# Altium PCB LimeSDR-Mini_2v5_Rounded.PcbDoc (part 6 of 7)
Units mm, origin at the board's own origin, x right, y up, seen from the top; angles counter-clockwise.
Board outline 69 x 31.37 mm, 8 copper layers (Top, L2, L3, L4, L5, L6, L7, Bottom), stack 1.555 mm thick; 439 components, 294 nets, 1986 pads, 831 vias.
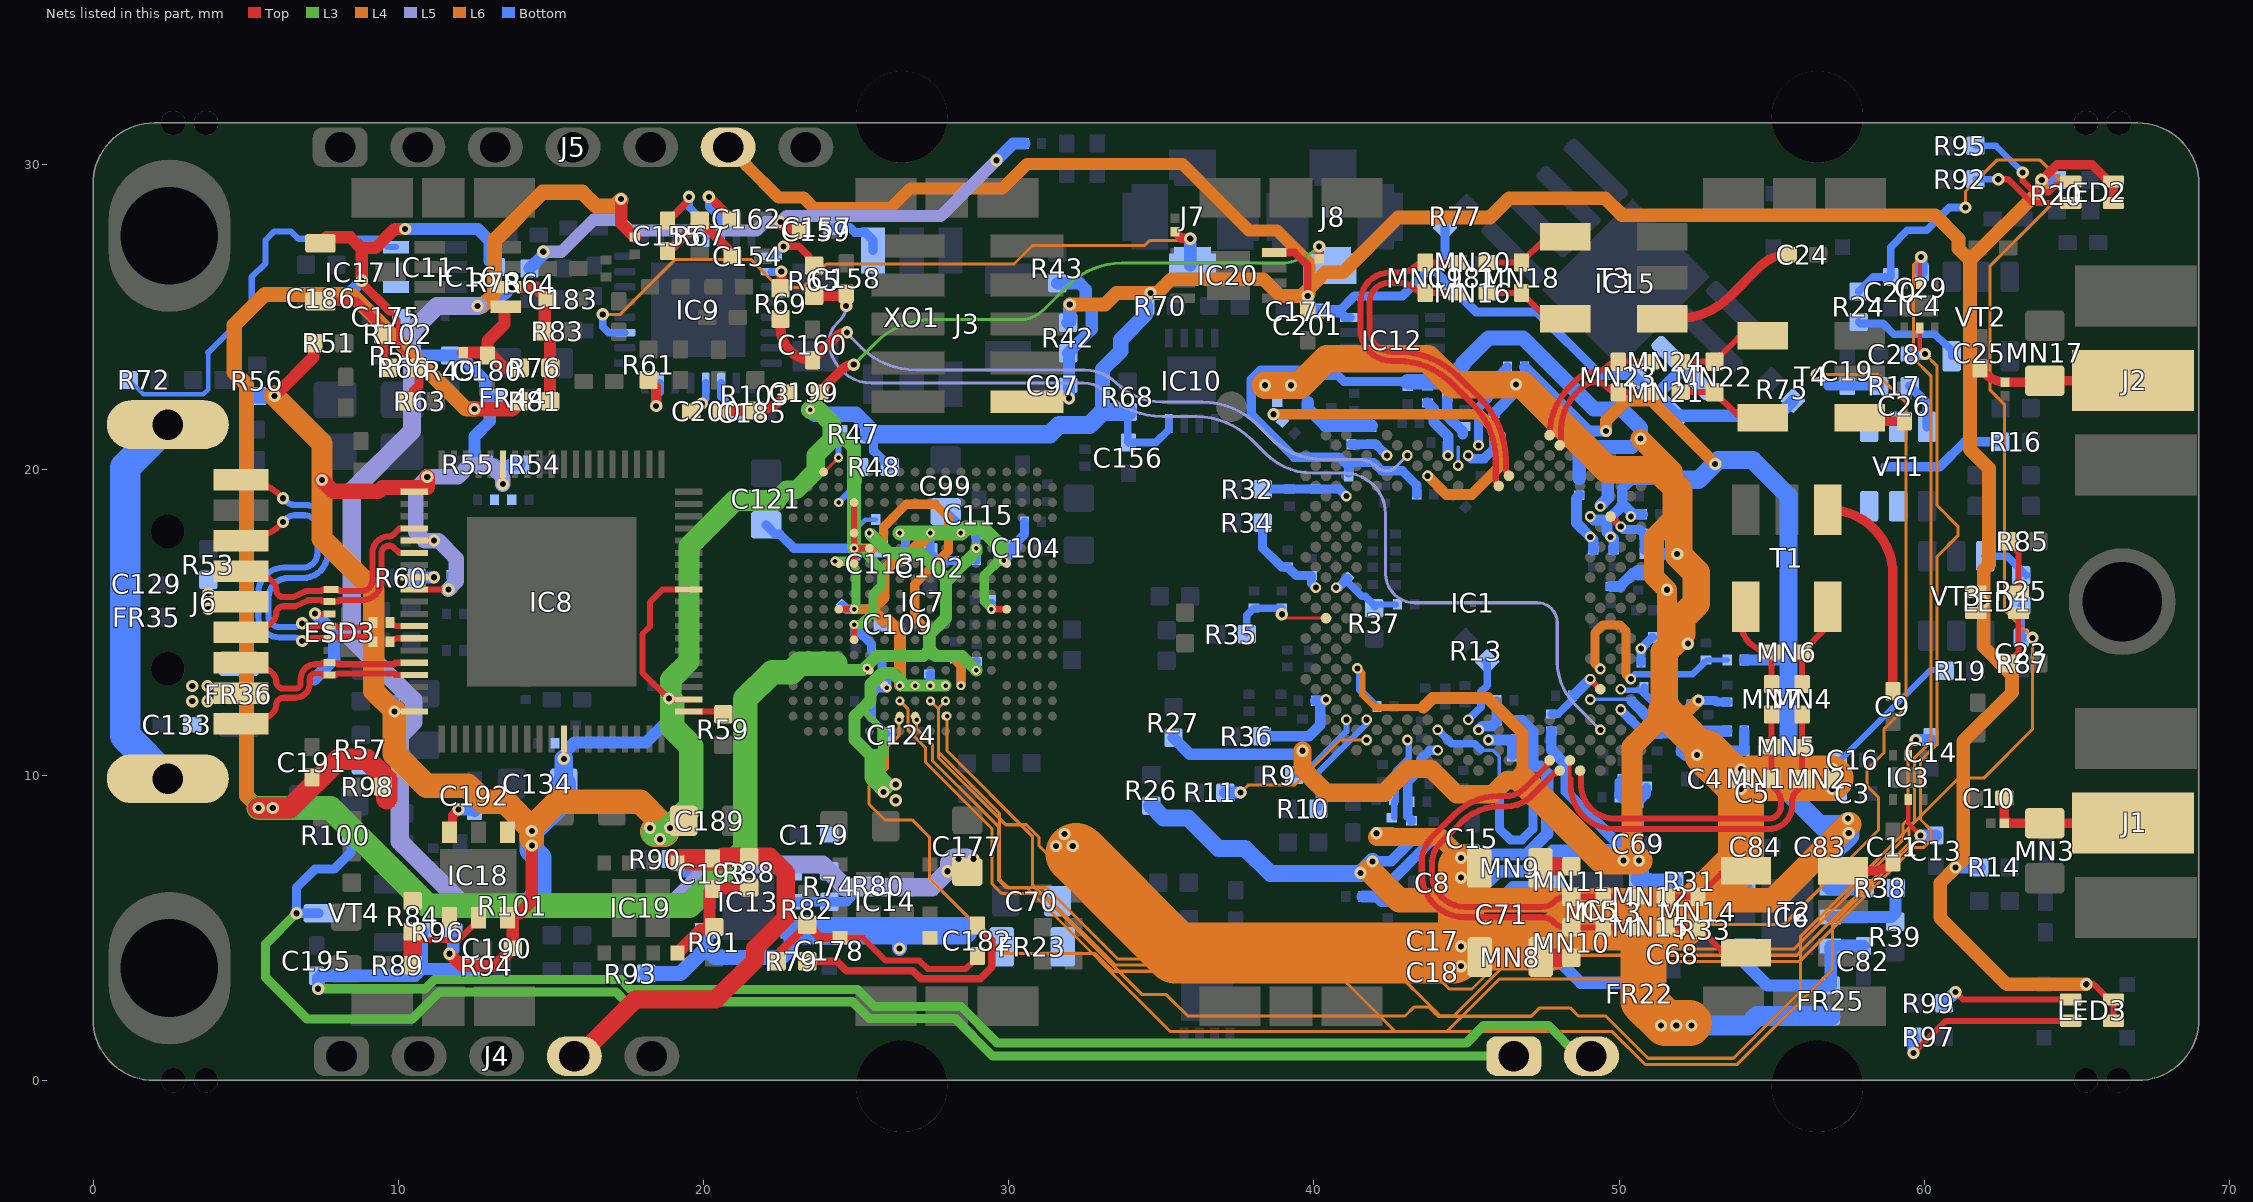
[diagram p11: the nets of this part, all layers, seen from the top]

## Via types
v1: diameter 0.4, hole 0.2, Top to Bottom, tented both sides, 554 vias
v2: diameter 0.3, hole 0.15, Top to Bottom, tented both sides, 160 vias
v3: diameter 0.35, hole 0.2, Top to Bottom, tented both sides, 88 vias
v4: diameter 0.5, hole 0.2, Top to Bottom, tented bottom, 25 vias
v5: diameter 0.5, hole 0.2, Top to Bottom, tented both sides, 4 vias

## Nets (pads, with @x,y where several pads share a name; then routed paths per layer and width w, separated by ;. In a path a pad name is that pad's centre, name@x,y a point inside that pad or via, vN(x,y) a via of type N, cw(c..) or ccw(c..) an arc to the next point about the centre after c; other vN are vias at no path point) (continued)
NetC53_1: C53.1 FR10.1 IC1.AM20 | length 2
  Bottom w0.35: FR10.1@43.725,22.195 43.925,21.995 43.925,21.575 44.4,21.1 C53.1@44.4,20.903 ; v3(44.394,20.474) 44.394,20.901 C53.1@44.396,20.903
NetC54_1: C54.1 FR9.1 IC1.AL19 | length 2
  Bottom w0.11: v3(44.727,20.141) 44.726,20.746
  Bottom w0.35: FR9.1@44.375,22.32 44.375,21.766 44.876,21.265 44.876,21.17
NetC55_1: C55.1 FR8.1 IC1.AG5 | length 0.8
  Bottom w0.4: v3@49.389,18.834 49.633,19.078 49.633,19.58
  other v3: 49.389,18.809
NetC56_2: C56.2 FR7.1 IC1.AD6 | length 2.1
  Bottom w0.35: FR7.1@48.7,19.17 48.606,19.076 48.606,18.26 v3(49.056,17.81) 49.15,17.716 C56.2@49.15,17.38
NetC57_1: C57.1 FR5.1 IC1.J3 | length 2.1
  Bottom w0.18: v3(50.055,12.815) 50.092,12.778 50.723,12.778 C57.1@50.823,12.878
  Bottom w0.25: C57.1@50.823,12.878 50.823,12.677 51.2,12.3 FR5.1@51.745,12.3
NetC58_2: C58.2 FR4.1 IC1.J5 IC1.K6 | length 2.3
  Top w0.2: v3(49.056,13.148) IC1.J5@49.389,12.815
  Bottom w0.25: FR4.1@47.775,12.005 48.005,12.005 48.475,12.475 C58.2@48.475,12.6
  Bottom w0.35: C58.2@48.475,12.6 48.508,12.6 v3(49.056,13.148)
NetC59_2: C59.2 FR12.1 R28.2 R29.2 | length 1.9
  Bottom w0.3: R28.2@50.125,9.895 50.005,9.775 50.005,9.325 50.125,9.205 50.625,9.205 50.73,9.205 50.9,9.375 R29.2@50.9,9.595
NetC60_1: C60.1 FR18.1 IC1.K2 IC1.L5 | length 7.5
  L6 w0.3: v3(49.389,13.481) 49.208,13.662 49.208,14.658 49.475,14.925 50.025,14.925 50.225,14.725 50.225,13.311 v3(50.388,13.148)
  Bottom w0.17: C60.1@52.795,13.695 52.875,13.775 FR18.1@53.545,13.775
  Bottom w0.2: v3(50.388,13.148) v3@50.393,13.153
  Bottom w0.22: v3@50.393,13.178 50.52,13.305 52.405,13.305 C60.1@52.795,13.695
NetC61_1: C61.1 C62.1 FR21.1 IC1.C21 | length 2.9
  Bottom w0.3: FR21.1@43.2,8.505 43.2,8.525 43.075,8.65 43.075,9.775 43.495,10.195 43.495,10.52 43.792,10.817 v3(44.061,10.817)
NetC63_1: C63.1 C64.1 C65.1 FR20.1 IC1.AD4 IC1.AF2 IC1.AF6 | length 4.8
  Bottom w0.35: v3(49.056,18.476) 49.173,18.359 49.635,18.359 ; C65.1@49.825,17.38 49.825,17.737 49.605,17.957 49.605,18.329 49.635,18.359 ; C64.1@50.77,18.55 50.462,18.55 50.18,18.832 50.108,18.832 ; FR20.1@51.045,19.675 50.4,19.675 50.108,19.383 C63.1@50.108,19.142 50.108,18.832 ; 49.635,18.359 50.108,18.832
  other v3: 49.722,17.81 50.388,18.476
NetC66_1: C66.1 FR19.1 IC1.AN17 | length 3
  Bottom w0.3: v3(45.393,20.807) 45.393,22.043 46.075,22.725 46.075,23.105 FR19.1@46.345,23.375
NetC67_1: C67.1 IC1.D24 R30.1 | length 2.7
  Bottom w0.22: R30.1@42.631,8.631 C67.1@42.631,9.146 ; C67.1@42.681,9.146 42.681,10.126 43.114,10.559 43.114,11.098 v3(43.062,11.15)
NetC68_2: C68.2 FR22.2 IC5.1 IC5.6 | length 6
  Bottom w0.4: IC5.1@47.875,4.625 47.875,4.067 48.742,3.2 FR22.2@50.556,3.2 ; FR22.2@50.686,3.33 50.686,4.614 IC5.6@50.675,4.625 51.756,4.625 C68.2@51.761,4.63
NetC71_2: C71.2 IC5.3 | length 1.7
  Bottom w0.4: C71.2@46.15,5.95 46.525,6.325 47.5,6.325 IC5.3@47.65,6.475
NetC72_1: C72.1 C73.1 IC1.W31 R37.2 | length 2.6
  Bottom w0.2: R37.2@42.001,15.521 42.076,15.596 C73.1@42.696,15.596
  Bottom w0.25: C72.1@41.099,16.448 41.099,16.343 41.575,15.866 41.681,15.866 42.001,15.546 R37.2@42.001,15.521
  Bottom w0.3: v3(40.731,16.145) 40.796,16.145 C72.1@41.099,16.448
NetC74_1: C74.1 C75.1 IC1.H32 R36.2 | length 3.2
  Bottom w0.35: R36.2@38.3,11.278 C74.1@39.625,11.278 39.841,11.278 40.206,11.642 40.206,12.29 40.357,12.441 C75.1@40.05,12.441
  other v3: 40.398,12.482
NetC76_1: C76.1 C77.1 IC1.T32 R35.2 | length 3.5
  Top w0.11: v1(38.951,15.271) 39.073,15.149 IC1.T32@40.395,15.149
  Bottom w0.25: R35.2@37.801,14.671 37.801,15.24 C77.1@38.036,15.475 C76.1@38.95,15.475 ; v1(38.951,15.271) C76.1@38.95,15.475
NetC78_1: C78.1 C79.1 IC1.W33 R34.2 | length 3.3
  Bottom w0.3: R34.2@38.322,18.275 38.322,17.441 38.938,16.825 39.142,16.825 C79.1@39.146,16.821 39.426,16.541 C78.1@39.926,16.541 39.926,16.284 v3(40.065,16.145)
NetC80_1: C80.1 C81.1 IC1.AH30 R32.2 | length 2.6
  Bottom w0.3: R32.2@38.601,19.371 40.835,19.371 v3(41.064,19.142)
NetC82_2: C82.2 FR25.2 IC6.1 IC6.6 | length 6.1
  Bottom w0.4: IC6.1@54.125,4.4 54.125,3.842 54.861,3.105 FR25.2@56.936,3.105 56.936,4.389 IC6.6@56.925,4.4 C82.2@58.006,4.4 C82.2@58.011,4.405
NetC84_2: C84.2 IC6.3 | length 1.4
  Bottom w0.5: C84.2@53.986,7.655 53.986,6.438 IC6.3@54.125,6.3
NetC85_1: C85.1 FR24.1 IC1.G3 | length 2.1
  Bottom w0.3: v3(50.055,12.149) 50.055,12.134 50.837,11.351 51.851,11.351
NetC86_1: C86.1 FR32.1 IC1.E21 | length 7.6
  Bottom w0.11: 45.472,10.84 45.498,10.814 45.863,10.814 46.08,10.597 ; 46.056,10.621 46.08,10.597 ; C86.1@46.08,9.575 46.08,10.597
  Bottom w0.25: v3(44.061,11.483) 44.509,11.034 45.278,11.034 45.472,10.84
  Bottom w0.3: C86.1@46.08,9.575 46.08,8.244 46.444,7.88 46.816,7.88 47.175,8.239 FR32.1@47.175,9.72
NetC87_1: C87.1 FR31.1 IC1.D16 | length 1.3
  Bottom w0.35: v3(45.725,11.153) FR31.1@46.603,11.153 ; C87.1@46.503,10.657 FR31.1@46.503,11.078
NetC88_1: C88.1 FR30.1 IC1.E17 | length 1.4
  Bottom w0.35: v3(45.393,11.483) 45.513,11.603 45.828,11.603 45.995,11.77 C88.1@45.995,12.4
NetC89_1: C89.1 FR29.1 IC1.AK22 | length 11.8
  L6 w0.35: v1(38.675,21.825) 45.425,21.825 46.125,21.125 46.125,20.149 45.173,19.196 44.34,19.196 v3(43.728,19.808)
NetC90_1: C90.1 FR28.1 IC1.AM18 | length 1.6
  Bottom w0.31: v3(45.06,20.474) 45.163,20.371 45.576,20.371 45.901,20.696 FR28.1@45.901,21.291
NetC91_1: C91.1 FR27.2 IC1.AE3 IC1.AF4 | length 1.9
  Top w0.25: IC1.AF4@49.722,18.476 v3(50.055,18.143)
  Bottom w0.3: v3(50.055,18.143) 50.148,18.05 50.67,18.05 C91.1@50.82,17.9 FR27.2@50.82,17.375
NetC92_1: C92.1 FR26.2 IC1.N1 | length 1
  Bottom w0.3: C92.1@50.721,13.696 v3(50.721,14.147) FR26.2@51.089,14.514
NetC93_1: C93.1 FR34.1 IC1.AM26 | length 1.3
  Bottom w0.3: C93.1@41.226,20.841 FR34.1@41.876,20.841 42.029,20.841 v3(42.396,20.474)
NetC94_1: C94.1 FR33.2 IC1.H6 | length 4.9
  Bottom w0.11: v3(49.056,12.482) 50.358,12.482 50.432,12.408
  Bottom w0.35: 50.432,12.408 51.015,11.825 52.295,11.825 52.67,11.45 FR33.2@53.545,11.45
NetC95_1: C95.1 FR34.2 R41.2 | length 2.5
  Bottom w0.4: R41.2@39.801,22.216 39.801,22.021 40.371,21.451 FR34.2@41.901,21.451
NetC96_1: C96.1 FR33.1 R40.1 | length 1.2
  Bottom w0.35: R40.1@53.555,10.8 54.095,10.8 54.105,10.81 FR33.1@54.105,11.45
NetC97_2: C97.2 J3.10 R42.2 R43.2 | length 5
  Bottom w0.3: v1@31.95,22.402 v1@31.975,22.377
  Bottom w0.4: R43.2@31.594,26.116 32.327,26.116 32.525,25.918 32.525,25.45 32.725,25.25 32.725,24.611 32.05,23.936 32.05,23.925 R42.2@31.95,23.825 ; v1(31.975,22.35) 31.975,22.377 R42.2@31.975,23.773
NetC129_1: C129.1 FR35.2 J6.10 | length 12.8
  Bottom w1: J6.10@2.45,9.885 1.05,11.285 1.05,15.15 1.05,16.2 1.05,20.085 J6.10@2.45,21.485
NetC154_1: C154.1 C155.2 R67.2 | length 3.1
  Top w0.309: C155.2@18.825,27.175 18.825,27.225 18.92,27.32 19.021,27.32 R67.2@19.875,28.175 20.804,27.246 20.804,27.096 20.9,27 C154.1@20.95,27
NetC155_1: C155.1 IC9.13 | length 2.6
  Top w0.25: C155.1@18.825,28.175 18.825,28.225 18.95,28.35 19.026,28.35 19.496,28.82 19.496,28.921 v1(19.525,28.95)
  Bottom w0.25: v1(19.525,28.95) 19.525,28.625 20.075,28.075 IC9.13@20.075,27.65
NetC157_2: C157.2 XO1.6 | length 1.8
  Bottom w0.3: C157.2@24.225,27.95 24.795,27.95 24.962,27.783 25.305,27.783 25.555,27.533 XO1.6@25.555,27.19
NetC159_2: C159.2 FR38.1 R64.1 | length 19.1
  Top w0.4: v1(22.525,28.125) 22.775,27.875 C159.2@23.1,27.875 ; C159.2@23.15,27.825 C159.2@23.1,27.875 ; C159.2@23.2,27.825 23.15,27.875 C159.2@23.1,27.875
  L5 w0.4: v1(14.75,27.15) 15.35,27.15 16.4,28.2 17.225,28.2 17.575,27.85 21.743,27.85 22.018,28.125 v1(22.525,28.125) 22.725,28.325 27.775,28.325 v1(29.6,30.15)
  Bottom w0.4: R64.1@14.3,26.6 14.75,27.05 v1(14.75,27.15) ; v1(29.6,30.15) 30.15,30.7 FR38.1@30.52,30.7
NetC162_1: C162.1 IC9.14 | length 2.5
  Top w0.3: v1(20.175,28.95) 20.2,28.95 20.775,28.375 20.775,28.325 20.875,28.225 C162.1@20.925,28.225
  Bottom w0.25: v1(20.175,28.95) 20.175,28.625 20.575,28.225 IC9.14@20.575,27.65
NetC175_1: C175.1 FR41.2 IC11.4
NetC180_1: C180.1 FR42.2 IC16.1 R76.2 | length 3.9
  Top w0.4: FR42.2@12.13,23.85 C180.1@12.925,23.85 ; C180.1@12.925,23.75 C180.1@12.925,23.8 ; IC16.1@13.525,25.35 13.484,25.35 13.484,24.784 12.925,24.225 12.925,23.95 12.975,23.9 12.975,23.85 13.475,23.35 R76.2@13.975,23.35 R76.2@13.995,23.33
NetC182_2: C182.2 IC14.4 R79.1 R82.2 | length 8
  Top w0.2: IC14.4@24.475,4.675 25.225,4.675 25.975,3.925 27.075,3.925 27.35,3.65 28.6,3.65 C182.2@28.85,3.9
  Top w0.25: C182.2@28.85,3.9 28.975,4.025 C182.2@28.975,4.075
  Top w0.3: R79.1@22.4,3.9 22.55,4.05 22.55,4.25 R82.2@23.4,5.1 23.825,4.675 IC14.4@24.475,4.675
NetC185_1: C185.1 IC9.27 | length 1.2
  Bottom w0.25: IC9.27@20.575,22.85 20.575,22.4 20.925,22.05 20.925,22 21.05,21.875 C185.1@21.1,21.875
NetC192_2: C192.2 IC18.3 | length 1.3
  Top w0.3: IC18.3@11.675,8.125 11.775,8.225 11.775,8.675 v1(11.975,8.875)
  Bottom w0.4: v1(11.975,8.875) C192.2@12.45,8.875
NetC193_2: C193.2 IC19.4 R88.1 R91.2 | length 3.9
  Top w0.4: IC19.4@19.15,4.175 19.15,4.2 19.175,4.225 19.2,4.225 19.901,4.926 R91.2@20.198,4.926 ; R91.2@20.198,4.951 20.198,6.198 20.248,6.248 20.248,6.273 20.248,6.298 21.42,6.298 R88.1@21.445,6.323
NetC195_1: C195.1 J9.2 R94.2 R96.2 | length 50.1
  L3 w0.3: v1(7.375,3) 10.884,3 11.184,3.3 17.3,3.3 17.625,2.975 25.05,2.975 25.6,2.425 28.425,2.425 29.625,1.225 45,1.225 45.575,1.8 47.675,1.8 48.68,0.795 J9.2@49.096,0.795
  Bottom w0.4: v1(7.375,3) 7.375,3.35 7.45,3.425 10.545,3.425 10.77,3.65 ; R96.2@10.8,4.85 10.77,4.82 10.77,3.65 ; R94.2@12.4,3.75 12.3,3.65 10.77,3.65
NetC199_1: C199.1 C200.2 R103.2 | length 2.4
  Top w0.325: C200.2@20.6,21.925 21.64,21.925 ccw(c21.64,22.01) R103.2@21.7,21.95 ccw(c21.7,23.157) 22.554,22.304 C199.1@22.8,22.55
NetC200_1: C200.1 IC9.28 | length 1.2
  Top w0.35: C200.1@19.6,21.925 19.675,22 19.761,22 19.936,22.175 v1(19.95,22.175)
  Bottom w0.25: v1(19.95,22.175) 19.95,22.216 20.075,22.341 IC9.28@20.075,22.85
NetIC1_D28: IC1.D28 R11.1 | length 5.3
  L4 w0.1: v1(37.6,9.428) 37.847,9.675 39.375,9.675 40.85,11.15 v3(41.73,11.15)
  Bottom w0.4: R11.1@37.1,9.428 v1(37.6,9.428)
NetIC1_F18: IC1.F18 R13.1 | length 2.2
  Bottom w0.25: v3(45.06,11.816) 45.475,12.231 45.475,12.728 45.681,12.934 45.681,13.666 R13.1@45.63,13.718
NetIC1_F28: IC1.F28 R10.1 | length 3.6
  Bottom w0.2: R10.1@40.15,8.903 40.15,10.1 41.73,11.68 v3(41.73,11.816)
NetIC1_F30: IC1.F30 R9.1 | length 2.7
  Bottom w0.2: R9.1@39.35,10.003 39.628,10.003 41.064,11.439 v3(41.064,11.816)
NetIC5_5: IC5.5 R31.1 R33.2 | length 3
  Bottom w0.4: IC5.5@50.675,5.575 52.667,5.575 52.811,5.72 R31.1@52.811,6.53
NetIC6_5: IC6.5 R38.1 R39.2 | length 3
  Bottom w0.4: IC6.5@56.925,5.35 58.917,5.35 59.061,5.495 R38.1@59.061,6.305
NetIC7_T15: IC7.T15 R48.2 | length 1.4
  Bottom w0.2: v2(24.435,18.935) 25.1,19.6 R48.2@25.1,20.1
NetIC7_V16: IC7.V16 R47.2 | length 1.5
  Top w0.1: IC7.V16@23.935,19.935 23.96,19.935 v2(24.425,20.4)
  Bottom w0.2: v2(24.425,20.4) R47.2@24.425,21.175
NetIC8_27: IC8.27 R60.2 | length 1.2
  Top w0.2: IC8.27@10.525,16.485 v1(11.175,16.485)
  Bottom w0.4: R60.2@10.6,16.475 11.165,16.475 v1(11.175,16.485)
NetIC8_58: IC8.58 R59.2 | length 1.2
  Top w0.2: IC8.58@19.525,12.085 20.565,12.085 R59.2@20.65,12
NetIC9_17: IC9.17 R65.2 | length 1.9
  Top w0.25: v1(22.625,27.325) 23.126,27.325 23.45,27.001 23.45,26.875 R65.2@23.625,26.7
  Bottom w0.25: IC9.17@22.225,27 22.3,27 v1(22.625,27.325)
NetIC9_18: IC9.18 R69.2 | length 0.9
  Top w0.325: R69.2@22.525,25.95 ccw(c22.465,26.01) 22.55,26.01 v1(22.55,26.5)
  Bottom w0.25: IC9.18@22.225,26.5 v1(22.55,26.5)
NetIC9_31: IC9.31 R61.2 | length 1.8
  Top w0.35: R61.2@18.2,22.95 18.45,22.7 v1(18.45,22.1)
  Bottom w0.25: v1(18.45,22.1) 18.45,22.425 18.575,22.55 IC9.31@18.575,22.85
NetIC11_6: IC11.6 R72.2 | length 13.1
  Bottom w0.15: R72.2@1.175,22.95 1.65,22.475 3.612,22.475 3.775,22.638 ; 3.775,22.663 3.775,23.849
  Bottom w0.2: 3.775,23.849 5.2,25.274 5.2,26.324 5.65,26.774 5.65,27.536 5.934,27.82 6.48,27.82 6.725,27.575 9.375,27.575 9.65,27.3 IC11.6@9.925,27.3
NetIC13_5: IC13.5 R74.1 R80.1 | length 2.6
  Bottom w0.3: IC13.5@22.875,5.85 24.7,5.85 R80.1@25.225,6.375
NetIC17_2: IC17.2 R66.2 R102.1 | length 3.8
  Top w0.3: IC17.2@7.45,25.475 7.5,25.525 8.625,25.525 9.525,24.625 9.525,23.5 R66.2@9.675,23.35
NetIC18_5: IC18.5 R84.1 R89.1 | length 3.5
  Top w0.2: R84.1@10.6,4.6 11.984,4.6 12.625,5.241 IC18.5@12.625,5.325
  Top w0.6: R89.1@10.475,3.775 R84.1@10.475,4.875
NetJ6_7: J6.7 R53.2
  other v1: 3.775,15.45 3.775,15.95
NetJ9_1: J9.1 R100.2 VT4.D | length 49.6
  L3 w0.3: v1(6.661,5.475) 5.65,4.464 5.65,3.375 7.015,2.01 10.46,2.01 11.35,2.9 17.134,2.9 17.459,2.575 24.884,2.575 25.434,2.025 28.25,2.025 29.48,0.795 J9.1@46.554,0.795
  Bottom w0.3: v1(6.661,5.475) 6.661,6.311 7.275,6.925 7.9,6.925 8.45,7.475 R100.2@8.45,8.075 ; v1@6.711,5.475 VT4.D@7.4,5.475
NetLED1_3: LED1.3 R85.1 | length 1.8
  Top w0.2: R85.1@62.715,17.66 63.09,17.285 LED1.3@63.09,16.01
NetLED1_4: LED1.4 R87.1 | length 1.8
  Top w0.2: R87.1@62.715,13.66 63.09,14.035 LED1.4@63.09,15.31
NetLED2_3: LED2.3 R92.1 | length 3.4
  Top w0.2: v1(62.425,29.525) 62.75,29.525 63.525,28.75 LED2.3@64.8,28.75
  Bottom w0.2: R92.1@61.675,29.525 v1(62.425,29.525)
NetLED2_4: LED2.4 R95.1 | length 4.1
  Top w0.2: v1(63.225,29.75) 63.225,29.474 63.599,29.1 64.075,29.1 64.325,29.35 64.7,29.35 LED2.4@64.8,29.45
  Bottom w0.2: R95.1@61.675,30.625 62.35,30.625 v1(63.225,29.75)
NetLED3_3: LED3.3 R97.1 | length 6.1
  Top w0.2: v1(59.65,0.9) 60.7,1.95 LED3.3@64.8,1.95
  Bottom w0.4: v1(59.65,0.9) R97.1@59.65,1.425
NetLED3_4: LED3.4 R99.1 | length 4.4
  Top w0.2: v1(61.021,2.896) 61.267,2.65 LED3.4@64.8,2.65
  Bottom w0.4: R99.1@60.65,2.525 v1(61.021,2.896)
NetMN8_1: MN8.1 MN10.2 | length 1
  Top w0.6: MN8.1@47.412,4.067 47.464,4.015 MN10.2@48.435,4.015
NetMN9_1: MN9.1 MN11.2 | length 1
  Top w0.6: MN9.1@47.412,6.967 47.46,7.015 MN11.2@48.435,7.015
NetR16_2: R16.2 VT1.1 VT1.2 VT1.5 VT1.6 | length 4.1
  Bottom w0.309: 58.725,20.112 60.513,20.112 61.325,20.925 R16.2@62.5,20.925
NetR17_1: R17.1 VT1.3 | length 1.6
  Bottom w0.3: R17.1@59.525,22.75 60.09,22.185 60.09,21.415 VT1.3@60.094,21.411
NetR24_2: R24.2 VT2.3 | length 3.6
  Bottom w0.25: R24.2@57.85,24.85 57.9,24.8 58.65,24.8 59,24.45 60.35,24.45 60.7,24.1 60.725,24.1 60.9,23.925 VT2.3@60.9,23.725
NetR25_1: R25.1 VT3.3 | length 1.6
  Bottom w0.25: VT3.3@62,17.175 62.725,17.175 R25.1@63.35,16.55
PG_VCC1P1: IC13.3 R90.1 | length 1.3
  Bottom w0.3: R90.1@18.925,7.25 19.375,6.8 IC13.3@20.075,6.8
REF_CLK_IN: C199.2 ESD5.1 J8.1 | length 18.4
  Top w0.3: ESD5.1@40.175,26.925 v1(40.175,27.325)
  Top w0.325: C199.2@23.8,22.55 24.541,23.291 cw(c24.925,22.907) v1(24.925,23.45)
  L3 w0.1: v1(24.925,23.45) 25.649,24.174 cw(c27.463,22.36) 27.463,24.925 30.375,24.925 ccw(c30.375,26.011) 31.143,25.243 31.95,26.05 cw(c33.7,24.3) 33.7,26.775 38.847,26.775 ccw(c38.847,28.653) v1(40.175,27.325)
REF_CLK_OUT: ESD4.1 IC9.3 J7.1 | length 23.7
  Top w0.3: ESD4.1@35.45,27.8 35.45,27.795 35.455,27.795 35.656,27.594 35.931,27.594 v1(35.95,27.575)
  L6 w0.1: v1(16.7,25.1) 17.275,25.1 19.075,26.9 21.55,26.9 22.475,25.975 23.25,25.975 24.025,26.75 30.175,26.75 30.775,27.35 34.45,27.35 34.625,27.525 v1@35.95,27.525
  Bottom w0.25: v1(16.7,25.1) 16.7,24.7 16.9,24.5 IC9.3@17.425,24.5
  Bottom w0.4: J7.1@35.95,26.7 v1(35.95,27.575)
RFSW_RX_V1: C29.2 IC4.5 IC7.C11 | length 62.6
  Top w0.15: IC4.5@59.85,26.1 v1@59.85,26.975
  L4 w0.1: v2(26.435,12.435) 26.697,12.173 26.697,11.478 27.275,10.9 27.275,10.425 29.45,8.25 29.45,6.45 29.775,6.125 31.141,6.125 33.491,3.775 42.475,3.775 44.14,2.11 44.585,2.11 46.575,4.1 55.825,4.1 59.5,7.775 59.5,8.301 59.675,8.476 59.675,10.558 60.225,11.108 60.225,23.075 59.65,23.65 59.65,26.725 v1(59.9,26.975)
  Bottom w0.4: C29.2@59.9,26.475 v1(59.9,26.975)
RFSW_RX_V2: C28.2 IC4.2 IC7.B11 | length 62.9
  Top w0.15: IC4.2@59.85,24.65 59.85,23.975 v1(60.025,23.8)
  L4 w0.1: v2(26.41,11.81) 26.41,11.31 26.025,10.925 26.025,10.225 25.425,9.625 25.425,9.05 25.937,8.538 26.837,8.538 27.4,7.975 27.4,6.625 29.875,4.15 32.833,4.15 33.408,3.575 40.692,3.575 42.667,1.6 44.358,1.6 46.083,3.325 50.233,3.325 50.808,3.9 55.925,3.9 59.65,7.625 59.97,7.625 60.225,7.88 60.225,8.2 59.875,8.55 59.875,10.475 60.425,11.025 60.425,17.166 61.1,17.841 61.1,18.159 60.425,18.834 60.425,23.4 v1(60.025,23.8)
  Bottom w0.4: C28.2@59.525,23.8 v1(60.025,23.8)
RFSW_TX_V1: C14.2 IC3.5 IC7.B10 | length 44.1
  Top w0.15: IC3.5@59.475,10.65 59.475,10.9 v1(59.725,11.15)
  L4 w0.1: v2(26.985,11.81) 26.985,11.515 27.5,11 27.5,10.483 29.675,8.308 29.675,6.55 29.9,6.325 31.224,6.325 33.574,3.975 43.45,3.975 44.433,2.992 45.184,2.992 46.492,4.3 55.725,4.3 59.3,7.875 59.3,8.384 59.475,8.559 59.475,10.9 v1(59.725,11.15)
  Bottom w0.4: v1(59.725,11.15) C14.2@60.225,11.15
RFSW_TX_V2: C13.2 IC3.2 IC7.C9 | length 45.3
  Top w0.15: IC3.2@59.475,9.2 59.475,8.425 v1(59.875,8.025)
  L6 w0.1: v2(27.435,12.435) 27.7,12.17 27.7,10.75 29.7,8.75 29.7,6.6 30,6.3 30.6,6.3 35.305,1.595 49.78,1.595 50.85,0.525 53.875,0.525 57,3.65 57,5.15 v1(59.875,8.025)
  Bottom w0.4: v1(59.875,8.025) C13.2@60.375,8.025
RX: C25.2 ESD2.1 J2.1 MN17.1 | length 5.2
  Top w0.309: C25.2@61.775,23.375 C25.2@61.825,23.325 61.974,23.176 ccw(c62.7,23.901) 62.7,22.875 63.829,22.875 ccw(c63.829,23.046) MN17.1@63.95,22.925 66.815,22.925 ccw(c66.815,22.968) J2.1@66.845,22.937
RX1_H: C24.2 T3.3 | length 4.8
  Top w0.309: T3.3@51.415,24.955 51.853,24.955 ccw(c51.853,27.495) 53.649,25.699 54.629,26.679 cw(c55.525,25.783) C24.2@55.525,27.05
RX1_H_A_N: IC1.AJ15 MN19.1 MN20.2 | length 12.4
  Top w0.2: MN19.1@43.657,26.8 MN19.1@43.65,26.8 ; MN20.2@44.7,26.8 44.175,26.8 MN19.1@43.65,26.8 ; IC1.AJ15@46.059,19.475 cw(c46.3,19.716) 45.959,19.716 45.959,20.341 ccw(c43.394,20.341) 45.208,22.155 44.532,22.831 ccw(c42.735,21.035) 42.735,23.575 42.55,23.575 cw(c42.55,24.6) 41.525,24.6 41.525,25.5 cw(c42.495,25.5) 42.495,26.47 42.853,26.47 ccw(c42.853,27.089) 43.291,26.651 cw(c43.65,26.292) MN19.1@43.65,26.8
RX1_H_A_P: IC1.AK14 MN16.2 MN19.2 | length 11.6
  Top w0.2: MN16.2@44.7,25.8 44.175,25.8 MN19.2@43.65,25.8 cw(c43.65,26.308) 43.291,25.949 ccw(c42.853,25.511) 42.853,26.13 42.455,26.13 ccw(c42.455,25.5) 41.825,25.5 41.825,24.6 ccw(c42.55,24.6) 42.55,23.875 42.742,23.875 cw(c42.742,21.035) 44.75,23.043 45.448,22.345 cw(c43.411,20.308) 46.292,20.308 46.292,20.225 46.292,20.049 ccw(c46.633,20.049) IC1.AK14@46.392,19.808
RX1_H_B_N: MN18.1 MN20.1 T3.6 | length 2.8
  Top w0.2: MN20.1@45.7,26.8 MN18.1@46.75,26.8 ; MN18.1@46.8,26.8 47.558,27.558 cw(c48.19,26.927) T3.6@48.19,27.82
RX1_H_B_P: MN16.1 MN18.2 T3.4 | length 2.8
  Top w0.2: MN16.1@45.7,25.8 46.1,25.8 MN18.2@46.75,25.8 ; MN18.2@46.8,25.8 47.576,25.024 ccw(c48.165,25.613) T3.4@48.165,24.78
RX1_W: C26.2 T4.3 | length 1.3
  Top w0.309: T4.3@58.225,21.506 ccw(c58.191,21.506) 58.215,21.53 cw(c58.384,21.361) 58.384,21.6 C26.2@59.45,21.6
RX1_W_A_N: IC1.AP10 MN23.1 MN24.2 | length 4.6
  Top w0.2: IC1.AP10@47.724,21.14 cw(c49.958,21.14) 48.378,22.72 48.634,22.976 cw(c49.224,22.386) 49.224,23.22 ccw(c49.224,23.728) 49.583,23.369 ; 49.616,23.401 cw(c49.975,23.042) MN23.1@49.975,23.55 ; MN23.1@49.982,23.55 MN24.2@51.025,23.55
RX1_W_A_P: IC1.AN9 MN21.2 MN23.2 | length 4.5
  Top w0.2: IC1.AN9@48.057,20.807 ccw(c47.953,20.911) 48.1,20.911 48.1,21.325 cw(c49.771,21.325) 48.589,22.507 48.778,22.695 cw(c49.224,22.249) 49.224,22.88 cw(c49.224,22.372) 49.583,22.731 49.616,22.699 ccw(c49.975,23.058) MN23.2@49.975,22.55 MN21.2@51.025,22.55
RX2_W_B_N: MN22.1 MN24.1 T4.6 | length 2.8
  Top w0.2: MN24.1@52.025,23.55 MN22.1@53.075,23.55 ; MN22.1@53.125,23.55 53.883,24.308 cw(c54.515,23.677) T4.6@54.515,24.57
RX2_W_B_P: MN21.1 MN22.2 T4.4 | length 3.2
  Top w0.2: MN21.1@52.025,22.55 52.425,22.55 MN22.2@53.075,22.55 ; MN22.2@53.125,22.55 53.883,21.792 ccw(c54.515,22.423) T4.4@54.515,21.53 ; T4.4@54.12,21.53 T4.4@54.465,21.53
RXPLL_CLK: C160.2 IC1.AM24 R69.1 | length 23.3
  Top w0.325: R69.1@22.525,24.95 22.525,24.65 ccw(c23.575,24.65) C160.2@23.575,23.6 24.333,24.358 cw(c24.7,23.991) v1(24.7,24.51)
  L5 w0.1: v1@24.7,24.48 25.154,24.026 ccw(c26.968,25.84) 26.968,23.275 32.499,23.275 cw(c32.499,21.824) 33.525,22.85 ccw(c35.034,24.359) 35.034,22.225 36.348,22.225 cw(c36.348,19.685) 38.144,21.481 38.531,21.094 ccw(c40.327,22.89) 40.327,20.35 41.446,20.35 cw(c41.446,19.496) 42.05,20.1 ccw(c42.352,20.402) 42.352,19.975 42.425,19.975 ccw(c42.425,20.308) 42.661,20.073 v3(43.062,20.474)
TCXO_DAC_VREF: C183.1 IC16.2 R76.1 R78.2 R81.1 R83.1 | length 5.6
  Top w0.4: IC16.2@13.525,26 14.5,26 14.8,25.7 14.8,24.625 R83.1@14.725,24.55 14.975,24.3 R76.1@14.975,23.35 R81.1@14.975,22.25
  Bottom w0.4: R78.2@13.2,25.65 13.3,25.75 13.461,25.75 v1@13.718,26.007
  other v1: 13.725,26
TX: C10.2 ESD1.1 J1.1 MN3.1 | length 4.9
  Top w0.309: C10.2@62.625,9.2 62.625,8.65 ccw(c62.85,8.65) 62.85,8.425 MN3.1@63.95,8.425 66.815,8.425 ccw(c66.815,8.468) J1.1@66.845,8.437
TX1_1: C9.2 T1.3 | length 7.2
  Top w0.309: T1.3@56.845,18.7 cw(c56.845,16.57) 58.975,16.57 C9.2@58.975,12.75
TX1_1_A_N: IC1.A7 MN1.1 MN5.1 MN7.2 | length 11.1
  Top w0.2: IC1.A7@48.723,10.101 48.757,10.067 48.757,9.675 ccw(c49.857,9.675) 49.857,8.575 54.9,8.575 ccw(c54.9,8.979) 55.304,8.979 55.304,9.146 ccw(c54.796,9.146) 55.155,9.505 ; IC1.A7@48.723,10.151 IC1.A7@48.758,10.116 ; MN1.1@55,9.695 55,9.877 MN5.1@55,10.935 MN7.2@55,11.985 ; MN1.1@55.001,9.87 ccw(c55.509,9.87) 55.149,9.51
TX1_1_A_P: IC1.B8 MN2.1 MN4.1 MN5.2 | length 12.3
  Top w0.11: 48.39,9.916 48.39,10.128 IC1.B8@48.39,10.484
  Top w0.2: 48.414,9.881 48.414,9.675 ccw(c49.854,9.675) 49.854,8.235 54.9,8.235 ccw(c54.9,9.006) 55.671,9.006 55.671,9.119 cw(c56.179,9.119) 55.819,9.478 55.852,9.51 ccw(c55.493,9.87) MN2.1@56.001,9.87 ; MN2.1@56,9.885 56,10.285 MN5.2@56,10.935 MN4.1@56,11.985
TX1_1_B_N: MN6.2 MN7.1 T1.6 | length 2.7
  Top w0.2: T1.6@53.98,15.055 ccw(c55,15.055) MN6.2@55,14.035 MN7.1@55,12.985
TX1_1_B_P: MN4.2 MN6.1 T1.4 | length 2.8
  Top w0.2: MN4.2@56,12.985 MN6.1@56,14.035 56.776,14.811 ccw(c56.187,15.4) T1.4@57.02,15.4
TX1_2: C11.2 T2.1 | length 1.9
  Top w0.309: T2.1@57.19,6.87 T2.1@57.34,6.87 58.35,6.87 ccw(c58.35,7.703) 58.939,7.114 C11.2@58.975,7.15
TX2_1_A_N: IC1.B10 MN10.1 MN13.2 MN15.1 | length 14
  Top w0.2: IC1.B10@47.724,10.484 47.689,10.449 ccw(c47.848,10.291) 47.624,10.291 46.891,9.559 cw(c46.303,10.147) 46.303,9.315 46.075,9.315 ccw(c46.075,7.225) 44.597,8.703 43.885,7.99 ccw(c44.729,7.146) 43.535,7.146 43.535,6.76 ccw(c44.95,6.76) 44.95,5.345 47.495,5.345 cw(c47.495,4.837) 47.854,5.196 47.886,5.164 ccw(c48.246,5.523) 48.246,5.015 MN10.1@48.435,5.015 MN13.2@49.485,5.015 MN15.1@50.535,5.015
TX2_1_A_P: IC1.A9 MN11.1 MN12.2 MN13.1 | length 13.2
  Top w0.2: IC1.A9@48.057,10.151 48.022,10.116 cw(c47.864,10.274) 47.864,10.051 47.128,9.315 cw(c46.308,10.136) 46.308,8.975 46.075,8.975 ccw(c46.075,7.225) 44.837,8.462 44.125,7.75 ccw(c44.729,7.146) 43.875,7.146 43.875,6.76 ccw(c44.95,6.76) 44.95,5.685 47.495,5.685 ccw(c47.495,6.193) 47.854,5.834 47.886,5.866 cw(c48.246,5.507) 48.246,6.015 MN11.1@48.435,6.015 48.835,6.015 MN13.1@49.485,6.015 MN12.2@50.535,6.015
TX2_1_B_N: MN14.1 MN15.2 T2.4 | length 3.2
  Top w0.2: MN15.2@51.535,5.015 51.935,5.015 52.585,5.015 53.344,4.257 ccw(c53.975,4.888) T2.4@53.975,3.995 ; T2.4@53.605,3.995 T2.4@53.95,3.995
TX2_1_B_P: MN12.1 MN14.2 T2.6 | length 2.8
  Top w0.2: MN12.1@51.535,6.015 MN14.2@52.585,6.015 53.344,6.773 cw(c53.975,6.142) T2.6@53.975,7.035
TX_LB_AT: C19.1 IC7.C8 R17.2 | length 56.9
  L4 w0.1: v2(27.935,12.435) 27.7,12.2 27.7,10.575 29.9,8.375 30.583,8.375 31,7.958 31,7.68 33.905,4.775 44.075,4.775 44.4,5.1 55.394,5.1 58.5,8.206 58.5,9.275 58.125,9.65 58.125,10.175 58.675,10.725 58.675,11.5 59.4,12.225 59.4,22.2 58.475,23.125 v1(56.475,23.125)
  Bottom w0.3: v1(56.475,23.125) 56.85,22.75 C19.1@57.475,22.75 R17.2@58.525,22.75
TX_LB_SH: C20.1 C23.1 IC7.B8 R24.1 R25.2 | length 78.3
  L4 w0.1: v1(61.35,28.6) 61.35,29.125 62.375,30.15 63.8,30.15 64.425,29.525 64.425,28.95 62.15,26.675 62.15,22.625 62.625,22.15 62.625,15.425 v1(63.55,14.5)
  L6 w0.1: v2(27.985,11.935) 27.985,10.79 30.775,8 30.775,6.408 34.373,2.81 35.165,2.81 35.865,2.11 42.985,2.11 43.275,2.4 43.775,2.4 44.075,2.1 47.125,2.1 47.4,2.375 48.4,2.375 48.665,2.11 49.565,2.11 50.95,0.725 53.75,0.725 55.95,2.925 55.95,4.725 61.125,9.9 61.95,9.9 63.55,11.5 v1(63.55,14.5)
  Bottom w0.25: R24.1@57.85,25.85 58.325,26.325 C20.1@58.9,26.325 58.9,27.3 59.45,27.85 60.075,27.85 60.825,28.6 v1(61.35,28.6) ; R25.2@63.175,15.55 C23.1@63.175,14.5 v1(63.55,14.5)
TXPLL_CLK: C158.2 IC1.E5 R65.1 | length 36.1
  Top w0.325: R65.1@23.625,25.7 24.675,25.7 24.75,25.7 C158.2@24.675,25.775
  Top w0.4: v1(24.675,25.375) 24.675,25.7 C158.2@24.675,25.775
  L5 w0.1: v1(24.675,25.375) cw(c24.023,25.375) 24.484,24.914 24.358,24.788 ccw(c24.922,24.225) 24.125,24.225 ccw(c25.5,24.225) 25.5,22.85 32.451,22.85 cw(c32.451,21.826) 33.175,22.55 33.231,22.494 ccw(c35.027,24.29) 35.027,21.75 36.148,21.75 cw(c36.148,19.21) 37.944,21.006 38.406,20.544 ccw(c39.961,22.099) 39.961,19.9 41,19.9 cw(c41,18.55) 42.35,18.55 42.35,16.6 ccw(c43.3,16.6) 43.3,15.65 47.325,15.65 cw(c47.325,15) 47.975,15 47.975,13.725 ccw(c49.974,13.725) 48.56,12.312 v3(49.389,11.483)
USB_D_N: ESD3.2 IC8.25 J6.2 | length 8
  Top w0.2: J6.2@4.85,14.685 5.022,14.685 ccw(c5.022,15.923) 5.897,15.047 ccw(c5.65,15.295) 6,15.295 cw(c6.24,15.295) 6.24,15.535 6.625,15.535 7.05,15.735 ; ESD3.2@7.742,15.685 7.53,15.685 7.48,15.735 ; ESD3.2@7.818,15.685 8.03,15.685 8.08,15.735 8.805,15.735 ccw(c8.805,16.38) 9.45,16.38 9.45,17.275 cw(c9.695,17.275) 9.695,17.52 ; 9.7,17.52 cw(c9.7,17.303) 9.853,17.457 10.025,17.285 IC8.25@10.525,17.285 ; 7.05,15.735 7.48,15.735 ; 7.05,15.735 7.48,15.735
USB_D_P: ESD3.1 IC8.23 J6.3 | length 8.7
  Top w0.2: J6.3@4.65,16.65 4.685,16.685 J6.3@4.85,16.685 J6.3@5.022,16.685 ; J6.3@5.39,16.685 J6.3@5.022,16.685 ; ESD3.1@7.742,16.085 7.53,16.085 7.48,16.035 ; ESD3.1@7.818,16.085 8.03,16.085 8.08,16.035 8.805,16.035 ccw(c8.805,16.38) 9.15,16.38 9.15,17.275 cw(c9.7,17.275) 9.7,17.825 ccw(c9.7,18.042) 9.853,17.888 10.05,18.085 IC8.23@10.525,18.085 ; J6.3@5.022,16.685 cw(c5.022,15.447) 5.897,16.323 cw(c5.65,16.075) 6,16.075 ccw(c6.24,16.075) 6.24,15.835 6.55,15.835 6.975,16.035 ; 6.975,16.035 7.48,16.035 ; 6.975,16.035 7.48,16.035
USB_SSRX_N: ESD3.7 IC8.34 J6.8 | length 7.4
  Top w0.2: J6.8@5.39,13.685 J6.8@4.85,13.685 5.022,13.685 cw(c5.022,12.447) 5.897,13.323 cw(c5.65,13.075) 6,13.075 ccw(c6.24,13.075) 6.24,12.835 6.625,12.835 ccw(c6.625,13.01) 6.8,13.01 6.8,13.15 cw(c7.285,13.15) 7.285,13.635 ; IC8.34@10.525,13.685 9.9,13.685 9.85,13.635 8.005,13.635 7.955,13.685 ESD3.7@7.742,13.685 7.53,13.685 7.48,13.635 ; 7.285,13.635 7.48,13.635 ; 7.285,13.635 7.48,13.635
USB_SSRX_P: ESD3.8 IC8.35 J6.9 | length 6.9
  Top w0.2: J6.9@4.2,11.685 J6.9@4.372,11.685 ; J6.9@5.022,11.685 ccw(c5.022,12.923) 5.897,12.047 ccw(c5.65,12.295) 6,12.295 cw(c6.24,12.295) 6.24,12.535 6.625,12.535 ccw(c6.625,13.01) 7.1,13.01 7.1,13.15 cw(c7.285,13.15) 7.285,13.335 ; IC8.35@10.525,13.285 9.9,13.285 9.85,13.335 8.005,13.335 7.955,13.285 ESD3.8@7.742,13.285 7.53,13.285 7.48,13.335 ; 7.285,13.335 7.48,13.335 ; 7.285,13.335 7.48,13.335
USB_SSTX_N: C127.1 ESD3.4 J6.5 | length 11.5
  Top w0.2: J6.5@4.85,19.685 cw(c4.85,17.838) 6.156,19.144 v1(6.225,19.075) ; v1(6.85,14.975) ccw(c7.067,15.192) 7.067,14.885 ESD3.4@7.742,14.885 7.955,14.885 8.005,14.835 8.772,14.835 ccw(c8.772,15.398) C127.1@9.17,15 C127.1@9.153,15
  Bottom w0.2: v1(6.225,19.075) 6.335,18.965 ccw(c6.6,19.229) 6.6,18.855 6.935,18.855 cw(c6.935,18.1) 7.69,18.1 7.69,17.275 cw(c6.875,17.275) 6.875,16.46 6.385,16.46 ccw(c6.385,15.825) 5.75,15.825 5.75,15.205 ccw(c6.1,15.205) 6.1,14.855 6.56,14.855 ccw(c6.56,15.265) v1(6.85,14.975)
USB_SSTX_P: C128.1 ESD3.5 J6.6 | length 11.5
  Top w0.2: J6.6@4.85,17.685 ccw(c4.85,19.532) 6.156,18.226 v1(6.225,18.295) ; v1(6.85,14.395) cw(c7.067,14.178) 7.067,14.485 ESD3.5@7.742,14.485 7.955,14.485 8.005,14.535 8.772,14.535 cw(c8.772,13.972) C128.1@9.17,14.37 C128.1@9.153,14.37
  Bottom w0.2: v1(6.225,18.295) 6.335,18.405 cw(c6.6,18.141) 6.6,18.515 6.935,18.515 cw(c6.935,18.1) 7.35,18.1 7.35,17.275 cw(c6.875,17.275) 6.875,16.8 6.244,16.8 ccw(c6.244,15.966) 5.41,15.966 5.41,15.205 ccw(c6.1,15.205) 6.1,14.515 6.56,14.515 cw(c6.56,14.105) v1(6.85,14.395)
USB_SSTXI_N: C127.2 IC8.31 | length 0.8
  Top w0.2: C127.2@9.73,15 ccw(c10.008,15.278) 10.008,14.885 IC8.31@10.525,14.885
USB_SSTXI_P: C128.2 IC8.32 | length 0.8
  Top w0.2: C128.2@9.73,14.37 cw(c10.008,14.092) 10.008,14.485 IC8.32@10.525,14.485
USB_VBUS: C133.1 ESD3.3 FR36.1 J6.1 R57.2 | length 3.2
  Top w0.2: ESD3.3@7.742,15.285 v1@7.311,15.285 ; v1@7.311,15.285 cw(c7.311,15.336) v1(7.275,15.3) ccw(c7.311,15.336) v1@7.311,15.285
  Bottom w0.4: 7.238,13.137 7.9,13.8 7.9,14.675 v1(7.275,15.3)
  other v1: 3.25,12.425 3.75,12.425 3.25,12.925 3.75,12.925
VCC1P1: C99.2 C100.2 C101.1 C102.2 C103.1 C104.2 C105.1 C106.1 C107.1 C108.1 C109.2 C179.2 IC7.D8 IC7.D9 IC7.D10 IC7.D11 IC7.J4 IC7.J5 IC7.J14 IC7.J15 IC7.M4 IC7.M15 IC7.P7 IC7.P9 IC7.P11 IC13.4 R74.2 | length 32.5
  Top w0.2: IC7.J15@24.435,15.435 v2(24.935,15.435) ; v2(29.435,15.435) IC7.J4@29.935,15.435
  L3 w0.2: 25.188,12.163 25.875,11.475
  L3 w0.3: v2(24.31,17.01) 24.715,17.01 25,16.725 25,15.5 v2(24.935,15.435) ; 25.875,10.75 25.875,11.45 ; v2(29.435,15.435) 29.435,15.467 29.2,15.702 29.2,16.55 v2@29.75,17.1
  L3 w0.4: 25.875,10.75 25.625,10.5 24.95,11.175 24.95,11.925 25.188,12.163 25.475,12.45 25.475,12.975 25.852,13.352 26.198,13.352 26.485,13.065 26.485,12.935 v2(26.935,12.935) v2(27.435,12.935) v2(27.935,12.935) ; v1(25.9,9.45) 25.9,9.675
  L3 w0.5: v2@26.44,17.935 v2(27.435,17.935) v2(28.435,17.935) 28.6,18.1 29.125,18.1 29.75,17.475 v2@29.75,17.1
  L3 w0.7: 25.625,10.5 25.625,9.95 25.9,9.675
  L4 w0.3: v2(24.935,15.435) 25.517,15.435
  L4 w0.4: v2(26.435,12.935) 26.435,14.69 26.05,15.075 25.877,15.075 25.517,15.435 25.9,15.818 25.9,16.675 26.275,17.05 26.55,17.05 v2(27.435,17.935)
  Bottom w0.3: C100.2@24.554,15.562 24.681,15.435 v2(24.935,15.435) 25.44,15.435 C109.2@25.9,14.975 ; C108.1@26.425,13.32 26.435,13.32 v2(26.435,12.935) ; v2(26.435,17.935) 26.625,17.745 C105.1@26.625,17.38 ; C103.1@27.425,13.32 27.435,13.32 v2(27.435,12.935) ; v2(27.435,17.935) 27.425,17.925 C102.2@27.425,17.3 27.425,17.25 27.525,17.15 27.575,17.15 27.695,17.03 C107.1@28.2,17.03 ; C99.2@27.935,18.585 27.985,18.585 28.285,18.285 28.285,18.235 28.435,18.085 v2(28.435,17.935) ; C106.1@29.433,15.622 29.435,15.62 v2(29.435,15.435) ; C104.2@30.075,17.45 30.52,17.895 C101.1@30.52,18.3
  Bottom w0.4: v2(29.835,17.035) 29.835,17.085 C104.2@30.25,17.5
  other v1: 26.3,9.175 26.3,9.7
VCC1P4_LMS: C83.2 FR18.2 FR19.2 FR20.2 FR21.2 IC6.4 R26.1 R38.2 | length 57.7
  L4 w0.4: v1(49.575,21.275) 49.575,21.625 50.225,22.275 51.075,22.275 v1(53.15,20.2)
  L4 w0.8: 41.825,6.875 42.8,5.9 55.05,5.9 v1@57.537,8.388
  Bottom w0.35: v1(41.925,7.175) 42.525,7.175 43.2,7.85 FR21.2@43.2,7.9 ; FR19.2@46.905,23.375 49.005,21.275 v1(49.575,21.275) ; FR18.2@54.105,13.775 55.5,13.775
  Bottom w0.5: IC6.4@56.925,6.3 56.931,6.305 R38.2@58.061,6.305
  Bottom w0.55: R26.1@34.675,9 35.075,8.6 35.875,8.6 36.875,7.6 37.75,7.6 38.575,6.775 41.525,6.775 v1(41.925,7.175)
  Bottom w0.6: FR20.2@51.75,19.675 52.6,19.675 53.25,20.325 54.379,20.325 55.55,19.154 55.55,9.417 C83.2@57.186,7.781 ; 56.6,8.4 57.275,8.4 ; IC6.4@56.925,6.375 C83.2@56.925,7.5
  Bottom w0.8: C83.2@56.925,7.5 57.475,8.05 57.475,8.375
  other v1: 41.525,6.8 57.525,8.1 57.5,8.575
VCC1P8: C177.2 C178.2 C182.1 FR23.1 FR40.1 IC13.1 IC13.6 IC14.5 R79.2 R93.2 | length 70.8
  Top w0.25: R79.2@23.4,3.9 24.374,3.9 24.684,3.59 26.862,3.59 27.127,3.325 29.064,3.325 29.45,3.711 29.45,4.6 C182.1@28.975,5.075
  Top w0.4: v1@17.304,28.871 17.304,28.076 FR40.1@17.75,27.63
  L5 w0.6: v1(12.6,25.375) 11.275,25.375 10.45,24.55 10.45,21.276 8.475,19.301 8.475,14.475 10.5,12.45 10.5,11.75 10.05,11.3 10.05,7.825 12.05,5.825 19.05,5.825 20.3,7.075 23.9,7.075 24.65,6.325 27.475,6.325 v1(28,6.85)
  L5 w1: v1@28.25,7.1 28.6,7.1
  L6 w0.5: v1@12.625,25.375 12.75,25.375 13.15,25.775 13.15,27.525 14.725,29.1 16.025,29.1 16.475,28.65 17.1,28.65 v1@17.3,28.85
  Bottom w0.5: R93.2@18.125,3.5 19.25,3.5 20.075,4.325 ; IC13.1@20.075,4.9 20.075,4.325 ; IC13.6@22.875,4.9 22.875,4.35 22.55,4.025 20.375,4.025 20.075,4.325 ; v1(26.425,4.325) 26.425,4.875
  Bottom w0.9: IC13.6@22.95,4.9 28.525,4.9
  other v1: 28.35,7.25 28.85,7.25 17.3,28.875
VCC1P8_LMS: C3.1 C4.2 C5.1 C8.2 C15.2 C16.1 C17.1 C18.2 C70.2 FR22.1 FR23.2 FR24.2 FR25.1 FR26.1 FR27.1 FR28.2 FR29.2 FR30.2 FR31.2 FR32.2 MN1.2 MN2.2 MN8.2 MN9.2 R19.2 R30.2 R40.2 R41.1 | length 90.6
  L6 w0.6: v1@42.075,7.975 44.134,7.975 v1(44.817,7.292)
  L6 w0.9: v1(38.4,22.776) v1(39.251,22.776) 39.551,22.776 40.425,23.65 43.725,23.65 44.575,22.8 v1(46.625,22.8) 46.825,22.8 47.525,22.1 49.625,20 51.3,20 51.95,19.35 51.95,17.205 52.525,16.63 52.525,15.625 52.05,15.15 52.05,14.625 51.475,14.05 51.475,12.125 51.5,12.1
  L6 w1.1: 51.5,12.1 52.875,10.725
  L6 w1.5: v1@44.825,4.45 44.825,7 ; 50.8,5.15 50.8,2.6 51.525,1.875 v1@52.3,1.875 ; 51.975,5.15 54,7.175 54,9.6 52.875,10.725 ; v1(54,9.55) 54.35,9.9 56.925,9.9
  L6 w1.7: v1@44.825,4.45 47.8,4.45 48.5,5.15 50.8,5.15 51.975,5.15
  L6 w2: 32.213,7.438 35.475,4.175 44.55,4.175 v1@44.825,4.45
  Bottom w0.2: C16.1@57.165,10.4 60.215,13.45 R19.2@60.675,13.45
  Bottom w0.35: FR28.2@45.901,21.851 46.625,22.575 v1(46.625,22.8) ; FR30.2@46.58,11.8 46.825,11.8 47.185,11.44 FR31.2@47.185,11.175 FR32.2@47.185,10.28
  Bottom w0.4: v1(38.4,22.776) v1(39.251,22.776) R41.1@39.801,22.776 ; v1(42.056,8.096) R30.2@42.556,8.096 ; C15.2@45.142,7.4 46.973,7.4 47.65,8.077 47.65,10.05 47.42,10.28 47.185,10.28 FR32.2@47.175,10.28 ; FR27.1@51.355,17.25 FR27.1@51.38,17.25 v1(51.905,17.25) ; FR26.1@51.654,14.509 52.054,14.509 v1(52.254,14.309) ; FR24.2@52.05,10.795 52.188,10.657 v1(52.555,10.657) 52.698,10.8 R40.2@52.995,10.8 ; C4.2@53.325,9.875 53.875,9.875
  Bottom w0.65: v1@51.4,1.8 v1(51.875,1.8) v1(52.375,1.8) 54.225,1.8 54.53,2.105 FR25.1@56.936,2.105
  other v1: 51.375,1.8 44.817,3.742 44.817,4.392 44.817,6.642 31.55,7.675 32.1,7.675 31.825,8.075 56.985,9.55 54,10.2 56.985,10.2
VCC1P25_LMS: C69.2 FR1.2 FR2.2 FR3.2 FR4.2 FR5.2 FR6.2 FR7.2 FR8.2 FR9.2 FR10.2 FR11.2 FR12.2 FR13.2 FR14.2 FR15.2 FR16.2 FR17.2 IC5.4 R27.1 R31.2 | length 94.5
  L4 w0.4: 51.575,12.075 52.225,12.075 v1(52.6,12.45)
  L4 w0.65: v1(50.7,21.025) 51.75,19.975 51.75,18.4 51.15,17.8 51.15,16.5 v1(51.575,16.075) 51.575,12.075
  L4 w0.7: 50.425,7.375 50.425,10.925 51.575,12.075
  L6 w0.22: v3(41.425,13.5) 41.59,13.335 41.59,12.635 42.01,12.215 43.585,12.215
  L6 w0.4: 43.585,12.215 43.895,12.525 45.7,12.525 46.838,11.388 46.838,9.837
  L6 w0.6: v1(39.625,10.8) 39.625,10.204 40.401,9.428 42.303,9.428 43.078,10.203 43.847,10.203 44.675,9.375 45.85,9.375 46.312,9.837 46.838,9.837
  L6 w0.9: 46.838,9.837 49.475,7.2 v1(50.15,7.2) v1(50.65,7.2)
  Bottom w0.2: FR11.2@42.954,22.851 FR11.2@43.075,22.73
  Bottom w0.25: v3(41.425,13.5) 41.5,13.425 41.5,12.799 FR14.2@42.059,12.239
  Bottom w0.3: FR13.2@41.145,19.9 41.145,20.105 ; FR11.2@42.954,22.851 42.904,22.901 40.985,22.901 40.786,23.1 40.4,23.1 40.225,23.275 38.262,23.275 37.95,22.963 37.95,21.821 39.355,20.416 40.834,20.416 41.145,20.105 ; FR1.2@43.37,19.2 43.37,19.505 42.9,19.975 42.225,19.975 41.95,20.25 41.29,20.25 41.145,20.105 ; v1(52.6,12.45) 53.15,12.45 53.2,12.4 FR17.2@53.55,12.4
  Bottom w0.35: 42.15,6.15 FR16.2@43.9,7.9 ; FR4.2@47.775,11.445 47.775,10.825 48.25,10.35 48.25,9.475 49.9,7.825 C69.2@50.125,7.825 ; FR6.2@49.725,16.18 50.021,16.18 50.471,16.63 FR2.2@50.625,16.63
  Bottom w0.38: R27.1@35.4,11.225 35.937,10.688 39.513,10.688 v1(39.625,10.8)
  Bottom w0.4: FR3.2@41.605,6.025 42.075,6.025 42.225,5.875 45.095,5.875 46.07,6.85 47.15,6.85 47.825,7.525 49.1,7.525 ; C69.2@50.125,7.825 50.625,8.325 FR12.2@50.625,8.52 ; FR5.2@52.375,12.3 52.45,12.3 v1(52.6,12.45)
  Bottom w0.45: FR7.2@48.7,19.73 48.7,20.55 48.9,20.75 50.425,20.75 v1(50.7,21.025) ; 49.1,7.525 C69.2@50.125,7.525
  Bottom w0.5: 43.075,22.895 44.34,22.895 FR9.2@44.375,22.93 44.38,22.93 44.875,23.425 44.875,23.478 45.722,24.325 46.85,24.325 49.175,22 50.075,22 50.7,21.375 v1(50.7,21.025) ; FR2.2@50.625,16.63 51.02,16.63 v1(51.575,16.075) ; IC5.4@50.675,6.525 50.681,6.53 R31.2@51.811,6.53
  Bottom w0.6: C69.2@50.125,7.75 50.125,7.525 50.675,6.975 IC5.4@50.675,6.6
VCC2P5: C111.2 C112.1 C113.2 C114.1 C115.2 C191.2 IC7.E6 IC7.E13 IC7.N6 IC7.P13 IC18.4 R81.2 R84.2 R98.1 | length 75
  Top w0.5: v1(12.5,22) 13.725,22 R81.2@13.975,22.25
  Top w0.7: v1(5.425,8.925) v1(5.888,8.925) 6.45,8.925 8.05,10.525 8.957,10.525 9.625,9.857 9.625,9.225
  L3 w0.4: 24.35,13.45 25.225,13.45 25.675,13.9 27.2,13.9 27.4,14.1 ; v2@25.47,17.9 26.095,17.275 27.125,17.275 27.95,16.45 ; v2(28.935,13.435) 28.47,13.9 27.6,13.9 27.4,14.1 ; v2(28.935,17.435) 28.935,17.332 28.611,17.009 28.001,16.399 27.95,16.45 ; 27.4,14.1 27.4,14.6 27.95,15.15 27.95,16.45
  L3 w0.8: v1(5.425,8.925) v1(5.888,8.925) 7.775,8.925 10.975,5.725 19.54,5.725 21.375,7.56 21.375,12.5 22.25,13.375 22.875,13.375 23.15,13.65 24.325,13.65
  L4 w0.5: v1(5.888,8.925) v1(5.425,8.925) 5.025,9.325 5.025,22.8 4.625,23.2 4.625,24.75 5.625,25.75 8.475,25.75 12.225,22 v1(12.5,22)
  Bottom w0.3: C114.1@24.955,13.425 24.955,13.446 25.296,13.446 v2(25.36,13.51) ; v2(25.435,17.935) 25.8,17.57 C113.2@25.8,17.425 ; C111.2@28.925,17.03 28.935,17.03 v2(28.935,17.435) 28.935,17.935 C115.2@29.025,18.025 ; v2(28.935,13.435) 28.935,13.72 C112.1@28.95,13.72
VCC2P5_VREF: C186.2 IC17.1 R63.1 R66.1 R78.1 | length 14.5
  Top w0.15: 9.713,25.212 10,24.925 10,24.025 R66.1@10.675,23.35 R66.1@10.675,23.4
  Top w0.3: IC17.1@7.45,27.375 IC17.1@7.7,27.375 ; v1@8.775,26.15 9.713,25.212 ; 8.775,27.275 8.8,27.275 ; R63.1@10.225,22.3 10.675,22.75 R66.1@10.675,23.35
  Top w0.4: IC17.1@7.45,27.425 7.65,27.625 8.425,27.625 8.775,27.275 ; v1(8.8,26.2) 8.8,27.275 9.25,27.275 9.875,27.9 v1(10.225,27.9)
  Bottom w0.4: C186.2@7.875,25.575 7.975,25.675 8.275,25.675 v1(8.8,26.2) ; v1(10.225,27.9) 12.607,27.9 13,27.507 13,26.85 R78.1@13.2,26.65
VCC3P3: C98.1 C110.1 C121.2 C122.1 C123.1 C124.2 C125.1 C126.1 C134.2 C135.2 C136.1 C137.2 C138.1 C139.2 C140.1 C141.2 C142.1 C156.1 C174.1 C181.1 C189.2 C190.2 C193.1 C201.1 FR44.1 IC7.D7 IC7.D12 IC7.G14 IC7.H14 IC7.M14 IC7.N13 IC7.N14 IC7.P14 IC7.T14 IC8.14 IC8.20 IC8.24 IC8.28 IC8.38 IC8.49 IC8.59 IC8.68 IC10.8 IC12.8 IC15.7 IC15.8 IC18.1 IC18.6 IC19.5 IC20.8 J4.4 J5.6 LED1.1 LED1.2 LED2.1 LED2.2 LED3.1 LED3.2 R14.1 R20.1 R42.1 R47.1 R48.1 R49.1 R50.1 R51.1 R54.2 R55.2 R56.2 R68.1 R70.1 R75.2 R77.2 R88.2 R96.1 R101.1 | length 278.9
  Top w0.2: v1(9.875,12.085) IC8.38@10.525,12.085 ; IC8.28@10.525,16.085 v1(11.64,16.085) ; IC8.24@10.525,17.685 v1(11.175,17.685) ; v1(13.425,19.535) IC8.14@13.425,20.185 ; v1(15.425,10.535) IC8.49@15.425,11.185 ; IC8.59@19.525,12.485 18.875,12.485 18,13.36 18,14.625 18.25,14.875 18.25,15.675 18.4,15.825 18.66,16.085 IC8.68@19.525,16.085 ; IC7.G14@24.935,14.435 v2(24.935,14.935) ; IC7.M14@24.935,16.935 v2(24.935,17.435) ; IC7.T14@24.935,18.935 IC7.P14@24.935,17.935 v2(24.935,17.435) ; IC7.N13@25.435,17.435 v2(24.935,17.435) ; v1(65.308,3.15) 65.55,3.15 66.05,2.65 LED3.2@66.2,2.65 LED3.1@66.2,1.95
  Top w0.25: IC20.8@38.7,27.125 39.375,27.125 39.8,26.7 C201.1@39.8,25.25
  Top w0.3: v1(63.85,29.5) 64.35,30 65.5,30 66.2,29.3 LED2.1@66.2,28.75
  Top w0.4: v1(5.95,22.425) 7.225,23.7 R51.1@7.225,24.15 ; v1(11.675,4.15) 12.075,3.75 13.175,3.75 C190.2@13.75,4.325 13.75,5.475 13.975,5.475 14.375,5.875 v1@14.375,7.584
  Top w0.5: v1(7.5,19.675) 7.875,19.3 9.35,19.3 9.475,19.425 10.937,19.425 10.95,19.438 v1(10.95,19.775)
  Top w0.6: J4.4@15.919,0.795 17.77,2.645 ; 17.765,2.65 20.4,2.65 21.7,3.95 21.7,4.331 22.7,5.331 22.7,6.794 22.172,7.323 R88.2@21.495,7.323 20.625,7.323
  Top w0.7: J4.4@15.768,0.795 J4.4@15.919,0.795 ; IC19.5@19.15,7.225 20.625,7.225
  L3 w0.3: v2(24.935,14.935) 25.16,14.935 25.56,15.335 25.56,15.935 25.85,16.225 25.85,16.725 25.14,17.435 v2(24.935,17.435)
  L3 w0.45: 24.2,21 24.675,21 24.935,20.74 v2(24.935,17.435)
  L3 w0.6: 22.375,19 22.725,19.35 23.05,19.35 23.675,19.975 23.675,20.475 24.2,21 24.2,21.525 23.75,21.975 v2(23.5,21.975)
  L3 w0.7: v1@18.925,12.51 18.925,13.125 19.525,13.725 19.525,17.5 21.025,19 22.375,19
  L3 w0.8: 18.35,8.1 18.725,8.1 v1(18.9,8.275) 19.6,8.975 19.6,10.95 18.975,11.575 v1@18.975,12.41
  L4 w0.3: v2(24.935,17.435) 25.585,17.435 25.9,17.75 25.9,18.125 26.65,18.875 27.6,18.875 28.025,18.45 28.025,17.35 26.925,16.25 26.925,15.175 27.45,14.65 27.45,14.15 27.7,13.9 28.125,13.9 28.435,13.59 v2(28.435,12.935)
  L4 w0.45: v1(32,25.425) 33.158,25.425 33.533,25.8 v1(34.65,25.8) 34.875,25.8 35.325,26.25 38.35,26.25 38.9,25.7 39.6,25.7 40.375,26.475 40.95,26.475 42.75,28.275 45.775,28.275 46.4,28.9 49.55,28.9 50.1,28.35 60.35,28.35 61.125,27.575 61.125,27.25 61.5,26.875 ; v1(63.85,29.5) 63.85,29.225 61.5,26.875 ; v1(65.308,3.15) 62.7,3.15 60.525,5.325 60.525,6.475 v1(61.025,6.975) 61.275,7.225 61.275,11.1 62.875,12.7 62.875,13.283 61.95,14.208 61.95,16.725 62.125,16.9 62.125,20.05 61.5,20.675 61.5,26.875
  L4 w0.7: v1(5.95,22.425) 7.5,20.875 v1(7.5,19.675) 7.5,17.75 9.2,16.05 9.2,12.76 v1(9.875,12.085)
  L4 w0.8: v1(9.875,12.085) 9.875,10.7 10.925,9.65 12.275,9.65 12.8,9.125 13.5,9.125 14.363,8.263 15.225,9.125 17.925,9.125 18.575,8.475 ; v1@14.375,7.9 v1(14.375,8.175)
  L4 w1: 18.425,8.15 18.712,8.15
  L5 w0.5: v1(11.64,16.085) 11.9,16.345 11.9,17.1 11.315,17.685 v1(11.175,17.685) 10.865,17.685 10.575,17.975 10.575,19.4 v1(10.95,19.775) 11.95,19.775 12.35,20.175 13,20.175 13.425,19.75 v1(13.425,19.535)
  L6 w0.4: J5.6@20.811,30.575 20.817,30.575 21.42,29.973 21.42,29.966 22.461,28.925 23.275,28.925 23.625,28.575 26.125,28.575 26.775,29.225 29.8,29.225 30.6,30.025 35.7,30.025 37.875,27.85 38.8,27.85 39.85,26.8 39.85,25.75 v1(39.8,25.7)
  Bottom w0.15: C98.1@24.927,18.027 24.952,18.027 25.3,18.375 C110.1@25.645,18.375
  Bottom w0.2: 25.505,11.881 C124.2@26.031,11.356
  Bottom w0.25: R68.1@33.9,21.9 33.9,20.925 C156.1@33.925,20.9 34.825,20.9 35.25,21.325 IC10.8@35.25,21.525 IC10.8@35.25,21.7 ; IC12.8@40.975,25.054 40.975,25.025 IC12.8@41,25
  Bottom w0.3: v1(9.875,12.085) C139.2@9.875,12.47 ; C137.2@10.805,17.675 10.805,17.68 11.17,17.68 v1(11.175,17.685) ; v1(11.64,16.085) 11.64,16.112 11.75,16.222 C138.1@11.75,16.57 ; C140.1@18.875,12.925 v1(18.875,12.51) 18.875,11.825 18.95,11.825 ; C121.2@22.05,18.2 22.35,17.9 22.5,17.9 22.965,17.435 v2@24.927,17.435 ; C98.1@24.927,18.027 v2@24.927,17.435 ; v2(24.935,14.935) 25,14.87 C125.1@25,14.705 25.095,14.705 25.5,14.3 25.5,14.075 25.85,13.725 25.85,13.375 26.01,13.215 v2(26.01,12.86) 25.71,12.86 25.505,12.655 C123.1@25.505,12.425 25.505,11.881 ; C126.1@24.975,17.18 24.975,17.395 v2(24.935,17.435) v2@24.927,17.435 ; R47.1@25.425,21.175 25.575,21.025 25.575,20.625 R48.1@26.1,20.1 ; C122.1@28.26,13.812 28.435,13.637 v2(28.435,12.935) ; IC12.8@40.975,25.054 40.829,25.2 41.329,25.7 42.9,25.7 43.7,26.5 43.993,26.5 ; IC12.8@41,25 IC12.8@41.175,25 ; R77.2@44.296,27.946 44.296,26.804 43.993,26.5 ; IC15.8@51,22.6 50.5,23.1 49.4,23.1 47.325,25.175 45.318,25.175 C181.1@44.546,25.946 43.993,26.5
  Bottom w0.4: R50.1@10.425,23.75 R49.1@11.7,23.75 12.025,23.75 12.85,22.925 12.85,22.825 12.85,22.525 13,22.375 13,21.6 12.5,21.1 12.5,20.475 R55.2@12.8,20.175 ; v1(11.675,4.15) 11.8,4.275 R96.1@11.8,4.85 ; R55.2@12.95,20.175 13.175,20.175 13.425,19.925 ; v1(13.425,19.535) 13.425,19.925 ; R54.2@13.975,20.175 13.675,20.175 13.425,19.925 ; 15.525,10.825 15.775,11.075 C135.2@15.82,11.075 18.125,11.075 18.875,11.825 ; R70.1@34.475,25.375 34.475,25.625 v1(34.65,25.8) ; v1(39.8,25.7) 39.8,25.45 C174.1@40.05,25.2 40.829,25.2 ; IC15.7@52.109,23.343 IC15.8@51.211,22.444 51.881,21.775 55.207,21.775 R75.2@55.704,22.271 ; v1(61.025,6.975) R14.1@61.8,6.975 ; v1(63.85,29.5) R20.1@64.35,29.5
  Bottom w0.45: R42.1@31.95,24.825 32,24.875 v1(32,25.425)
  Bottom w0.5: R56.2@5.375,22.425 v1(5.95,22.425) ; v2(23.5,21.975) 23.65,21.825 25,21.825 25.425,21.4 R47.1@25.425,21.175 ; 33.075,21.9 33.075,23.3 33.675,23.9 33.675,24.275 34.475,25.075 R70.1@34.475,25.375
  Bottom w0.6: C134.2@15.425,9.725 v1(15.425,10.535) ; R47.1@25.425,21.175 31.35,21.175 31.65,21.475 32.65,21.475 33.075,21.9 R68.1@33.9,21.9
  Bottom w0.8: R101.1@14.25,5.725 14.625,6.1 14.625,7.3 14.375,7.55 v1(14.375,7.7) v1(14.375,8.175) 15.425,9.225 C134.2@15.425,9.725
  other v1: 18.575,7.9 18.25,8.275 61.938,15.685